# Altium PCB Beetech GSM MKR1400.PcbDoc
Units mm, origin at the board's own origin, x right, y up, seen from the top; angles counter-clockwise.
Board outline 90 x 88 mm, 2 copper layers (Top Layer, Bottom Layer), stack 1.671 mm thick; 33 components, 33 nets, 143 pads, 38 vias.
Unrouted connection lines stored in the file: 173.
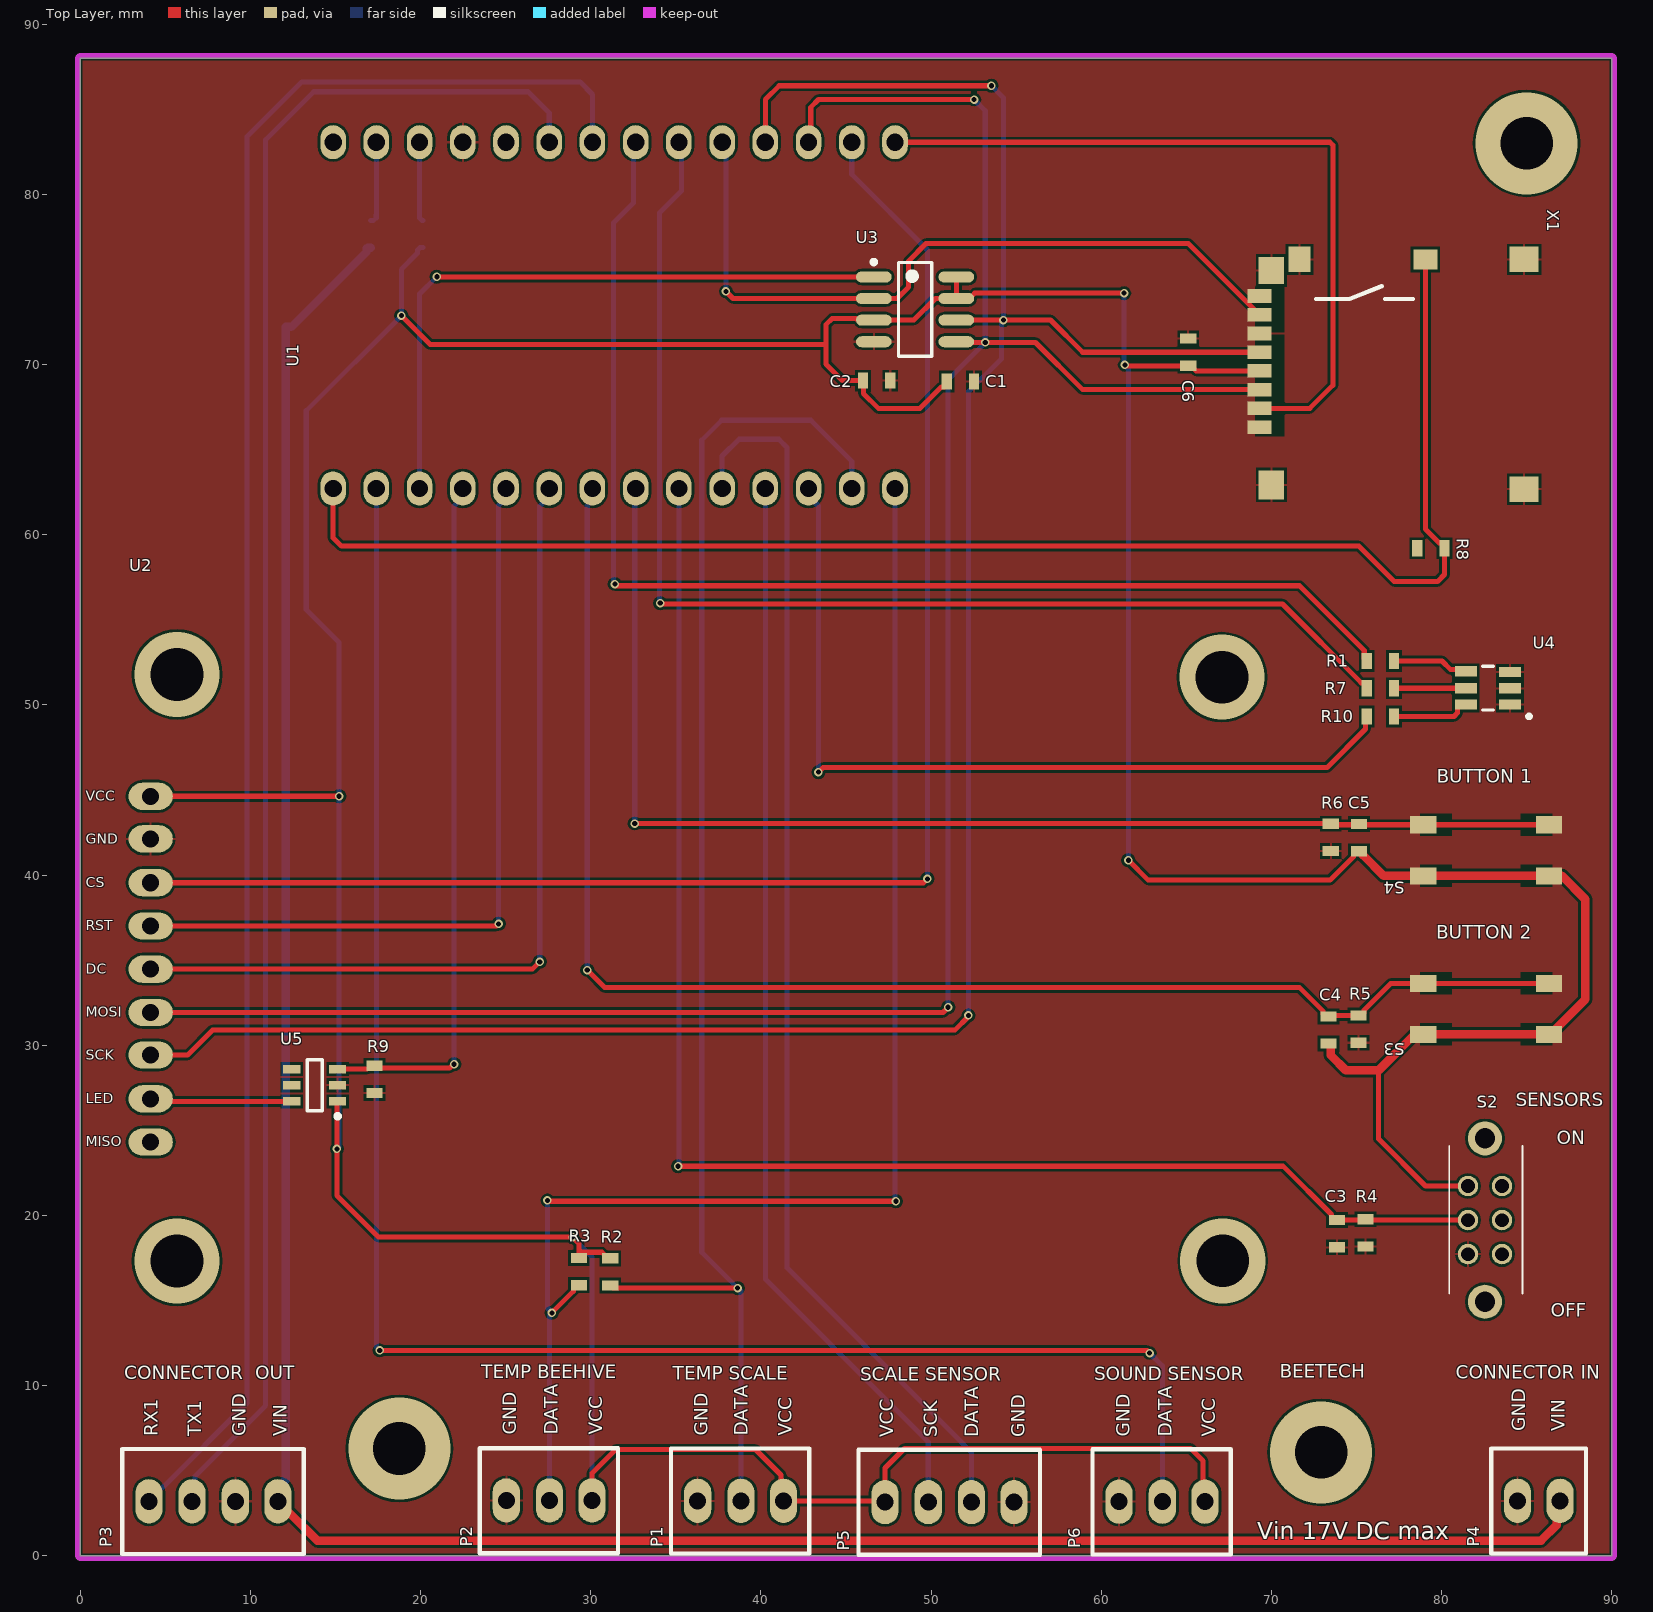
[diagram p0: Top Layer view]
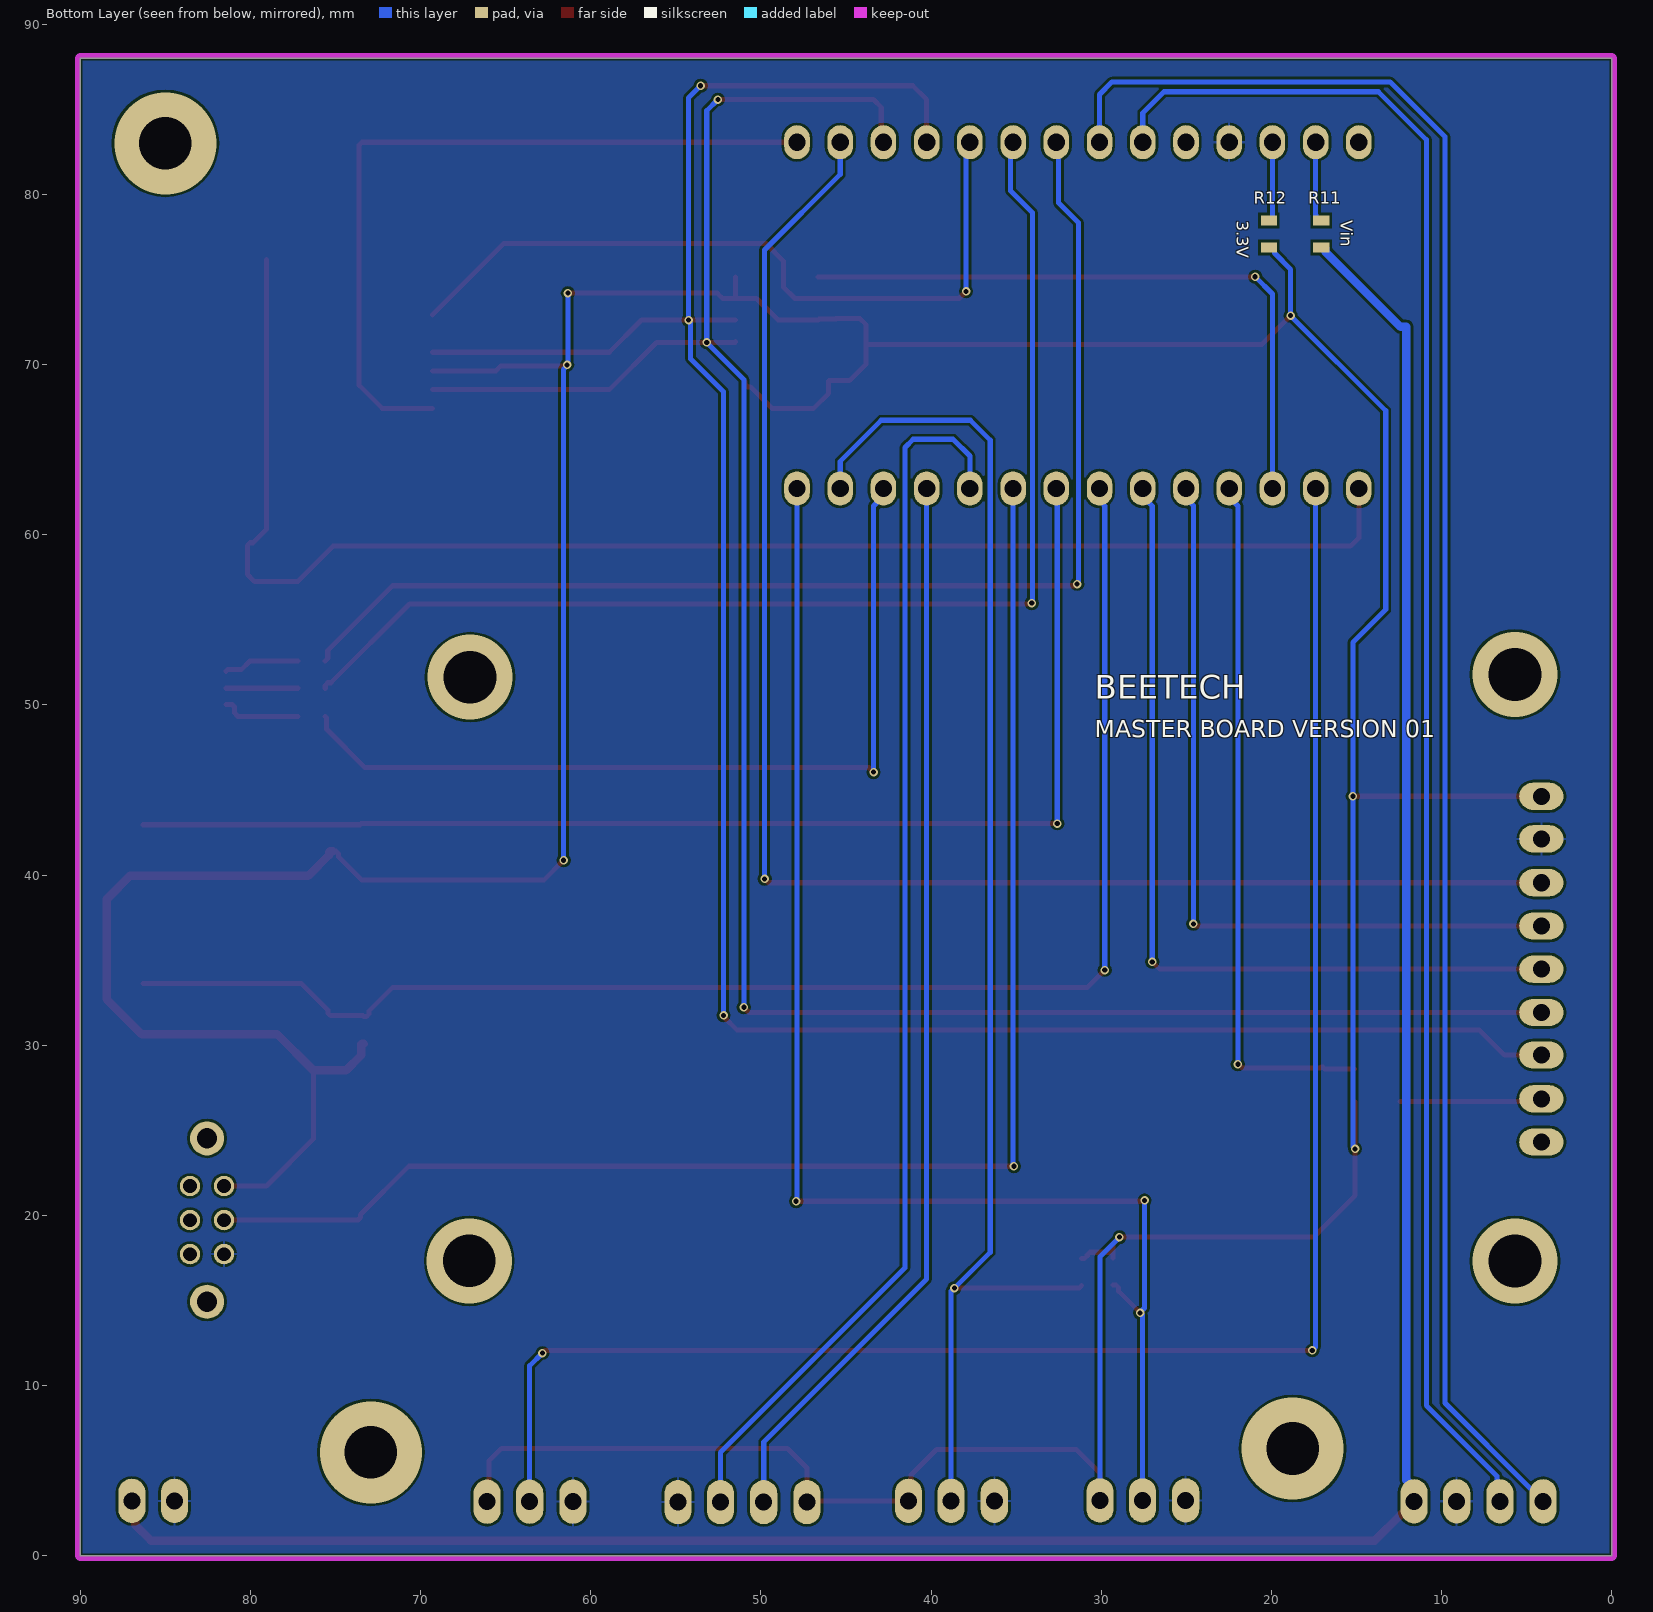
[diagram p1: Bottom Layer view, seen from below]

## Layer stack, top to bottom
Top Solder: solder mask 0.0102, Solder Resist, Dk 3.5
Top Layer: signal copper 0.0356
Dielectric1: core 1.6, FR-4, Dk 4.8
Bottom Layer: signal copper 0.0356
Bottom Solder: solder mask 0.0102, Solder Resist, Dk 3.5

## Board outline
0,0 90,0 90,88 0,88

## Design rules (kind name [scope] priority, off if disabled: settings)
Clearance Clearance_1 [InNamedPolygon('SW_L01_P024')] p1: gap=0.254 ignorepadtopadclearanceinfootprint=FALSE except(0: Arc-Hole Track-Hole SMDPad-Hole THPad-Hole Via-Hole Fill-Hole Poly-Hole Region-Hole Text-Hole)
Clearance [All] p2: gap=0.15 ignorepadtopadclearanceinfootprint=FALSE
ComponentClearance [All] p1: gap=0.001 collisioncheckmode=3 verticalgap=0.254 showdistances=FALSE
FabricationTestPointUsage [All] p1 off: valid=0 allowmultiple=FALSE
FabricationTestpoint [All] p1 off: side=3 testpointundercomponent=TRUE minsize=1.016 maxsize=2.54 preferedsize=1.524 minholesize=0 maxholesize=1.016 preferedholesize=0.813 testpointgrid=0.025 allowsidetop=TRUE allowsidebottom=TRUE usegrid=TRUE gridtolerance=0
HoleSize [All] p1: absolutevalues=TRUE maxlimit=6 minlimit=0.025 maxpercent=80.000 minpercent=20.000
HoleToHoleClearance [All] p1: gap=0 allowstackedmicrovias=TRUE
MinimumSolderMaskSliver [All] p1: minsoldermaskwidth=0
PolygonConnect PolygonConnect_14 [All vs IsNamedPolygon('GND_L01_P041')] p1: connectstyle=Relief reliefconductorwidth=0.15 reliefentries=4 polygonreliefangle="90 Angle" airgapwidth=0.15
PolygonConnect V_BAT_L01_P036 [All vs IsNamedPolygon('V_BAT_L01_P036')] p2: connectstyle=Direct reliefconductorwidth=0.254 reliefentries=4 polygonreliefangle="90 Angle" airgapwidth=0.254
PolygonConnect V_BAT2 [All vs IsNamedPolygon('V_BAT2_L01_P004')] p3: connectstyle=Direct reliefconductorwidth=0.254 reliefentries=4 polygonreliefangle="90 Angle" airgapwidth=0.254
PolygonConnect V_BAT [All vs IsNamedPolygon('V_BAT_L01_P010')] p4: connectstyle=Direct reliefconductorwidth=0.254 reliefentries=4 polygonreliefangle="90 Angle" airgapwidth=0.254
PolygonConnect V_SYS2 [All vs IsNamedPolygon('V_SYS2_L01_P012')] p5: connectstyle=Direct reliefconductorwidth=0.254 reliefentries=4 polygonreliefangle="90 Angle" airgapwidth=0.254
PolygonConnect +3.3b_uBlox [All vs IsNamedPolygon('+3.3V_UBLOX_L01_P014')] p6: connectstyle=Direct reliefconductorwidth=0.254 reliefentries=4 polygonreliefangle="90 Angle" airgapwidth=0.254
PolygonConnect V_LIPO_SYS_L01_P016 [All vs IsNamedPolygon('V_LIPO_SYS_L01_P016')] p7: connectstyle=Direct reliefconductorwidth=0.254 reliefentries=4 polygonreliefangle="90 Angle" airgapwidth=0.254
PolygonConnect V_LIPO_SYS_L01_P020 [All vs IsNamedPolygon('V_LIPO_SYS_L02_P020')] p8: connectstyle=Direct reliefconductorwidth=0.254 reliefentries=4 polygonreliefangle="90 Angle" airgapwidth=0.254
PolygonConnect V_SYS_L02_P024 [All vs IsNamedPolygon('V_SYS_L02_P024')] p9: connectstyle=Direct reliefconductorwidth=0.254 reliefentries=4 polygonreliefangle="90 Angle" airgapwidth=0.254
PolygonConnect VCC_USB_5.0V_L01_P026 [All vs IsNamedPolygon('VCC_USB_5.0V_L01_P026')] p10: connectstyle=Direct reliefconductorwidth=0.254 reliefentries=4 polygonreliefangle="90 Angle" airgapwidth=0.254
PolygonConnect SW [All vs IsNamedPolygon('SW_L01_P008')] p11: connectstyle=Direct reliefconductorwidth=0.254 reliefentries=4 polygonreliefangle="90 Angle" airgapwidth=0.254
PolygonConnect [All] p12: connectstyle=Relief reliefconductorwidth=0.15 reliefentries=4 polygonreliefangle="90 Angle" airgapwidth=0.15
RoutingVias [All] p1: holewidth=0.3 width=0.5 viastyle="Through Hole" minholewidth=0.2 minwidth=0.3 maxholewidth=1.2 maxwidth=2 useviatemplates=TRUE viatemplateguid#1={68F519FB-439D-452A-8ACF-2DE296BA9197} viatemplateguid#2={5ED9683F-E5DF-4E78-BDB1-49E541A8EC46} viatemplateguid#3={FAFF2F81-81C9-46E2-9D3D-D8AEF9417303} viatemplateguid#4={175E6F9D-763D-42D4-A59E-C21ACC7DA2E1} viatemplatename#1=v50h30m0mx0 viatemplatename#2=v50h30m50mx0 viatemplatename#3=v50h20 viatemplatename#4=v50h20mx0
SilkToSilkClearance [All] p1: silktosilkclearance=0.152
SilkToSolderMaskClearance [IsPad] p1: minsilkscreentomaskgap=0.127 clearancetoexposedcopper=TRUE
SolderMaskExpansion [All] p1: expansion=0.102 istentingtop=FALSE
Width [All] p1: maxlimit=5.08 minlimit=0.01 preferedwidth=0.305 minimp=50.000000 maximp=50.000000 favimp=50.000000
22 further rules are at their usual default settings.

## Components (designator, comment, footprint, x,y, rotation, side; value= is the part's Value field where it differs from the comment)
C1 "100nF 0603_1" "CAP 0603" 51.726,69.004 r180 top value=100nF
C2 "100nF 0603_1" "CAP 0603" 46.801,69.054 r180 top value=100nF
C3 "100nF 0603" "CAP 0603" 73.85,18.925 r270 top value=100nF
C4 "100nF 0603" "CAP 0603" 73.348,30.895 r90 top value=100nF
C5 "100nF 0603" "CAP 0603" 75.149,42.202 r90 top value=100nF
C6 "10uF 0603" "CAP 0603" 65.111,70.725 r270 top value=10uF
P1 "3-Pin Right Angle Housing" "3PIN - RND 205-EK254-2.54-03P" 41.325,3.225 r270 top
P2 "3-Pin Right Angle Housing" "3PIN - RND 205-EK254-2.54-03P" 30.078,3.25 r270 top
P3 "4-Pin Right Angle Housing" "4PIN - RND 205-EK254-2.54-04P" 11.615,3.2 r270 top
P4 "2-Pin Right Angle Housing" "2PIN - RND 205-EK254-2.54-02P" 86.965,3.225 r270 top
P5 "4-Pin Right Angle Housing" "4PIN - RND 205-EK254-2.54-04P" 54.875,3.15 r270 top
P6 "3-Pin Right Angle Housing" "3PIN - RND 205-EK254-2.54-03P" 66.09,3.175 r270 top
R1 "330 Ohm 0603" "RES 0603 FOOTPRINT" 76.403,52.578 r180 top value=330
R2 "4.7k Ohm 0603" "RES 0603 FOOTPRINT" 31.15,16.675 r270 top value=4.7k
R3 "4.7k Ohm 0603" "RES 0603 FOOTPRINT" 29.3,16.7 r270 top value=4.7k
R4 "1k Ohm 0603" "RES 0603 FOOTPRINT" 75.525,18.978 r90 top value=1k
R5 "10k Ohm 0603" "RES 0603 FOOTPRINT" 75.123,30.945 r90 top value=10k
R6 "10k Ohm 0603" "RES 0603 FOOTPRINT" 73.489,42.22 r90 top value=10k
R7 "330 Ohm 0603" "RES 0603 FOOTPRINT" 76.403,50.975 r180 top value=330
R8 "47k Ohm 0603" "RES 0603 FOOTPRINT" 79.375,59.2 r180 top value=47k
R9 "47k Ohm 0603" "RES 0603 FOOTPRINT" 17.297,27.991 r90 top value=47k
R10 "750 Ohm 0603" "RES 0603 FOOTPRINT" 76.403,49.324 r180 top value=750
R11 "0 Ohm 0603" "RES 0603 FOOTPRINT" 17.069,77.673 r270 bottom value=0
R12 "0 Ohm 0603" "RES 0603 FOOTPRINT" 20.151,77.673 r270 bottom value=0
S2 "Schiebeschalter EG2207" "Schiebeschalter on-on 2 P, EG2207" 82.55,19.725 r90 top
S3 "Taster Print_SMD_3" "Taster Print - SMD - PTS647SM70SMTR2LFS" 82.616,32.134 r180 top
S4 "Taster Print_SMD_3" "Taster Print - SMD - PTS647SM70SMTR2LFS" 82.616,41.456 r180 top
U1 "Arduino MKR GSM 1400" "Arduino GSM MKR 1400 v2" 11.05,72.875 r0 top locked
U2 "TFT 2.2 SPI 240x320" "TFT 2.2 SPI 240x320" 4.14,44.628 r0 top locked
U3 "FRAM MB85RS256BPNF-G-JNERE1" "SO 8Pin" 49.061,73.245 r0 top
U4 "LED Diode SMD LOW CURRENT" "LED SMD 3529 - 3.5 X 2.8MM" 82.725,50.975 r0 top
U5 "TPS22917DBVT" "SOT23 - 6" 13.78,27.65 r180 top
X1 "SD micro Card Holder_2" "SD Card Holder - micro - 2 - sd Card inserted" 85.7,75.425 r270 top

## Footprints (in the part's own frame and the unit in brackets; to place one, negate y for a bottom-side part, rotate by r counter-clockwise, add the part's x,y. Pads: shape width x height; smd on the part's side, far side on the other; paste and mask are expansions set on the pad)
"2PIN - RND 205-EK254-2.54-02P" [mm] "RND 205-EK254-2.54-02P"
  oval 2.6x1.6 hole 1: 1(0,0) 2(0,-2.5)
  silkscreen extent -3.07,-4.04 3.1,1.52, body extent -3.1,-3.99 3.1,1.55, height 8.51
"3PIN - RND 205-EK254-2.54-03P" [mm] "RND 205-EK254-2.54-03P"
  oval 2.6x1.6 hole 1: 1(0,0) 2(0,-2.5) 3(0,-5.04)
  silkscreen extent -3.07,-6.6 3.1,1.52, body extent -3.1,-6.55 3.1,1.53, height 8.51
"4PIN - RND 205-EK254-2.54-04P" [mm] "RND 205-EK254-2.54-04P"
  oval 2.6x1.6 hole 1: 1(0,0) 2(0,-2.5) 3(0,-5.04) 4(0,-7.58)
  silkscreen extent -3.07,-9.14 3.1,1.52, body extent -3.1,-9.1 3.1,1.52, height 8.51
"Arduino GSM MKR 1400 v2" [mm] "Arduino GSM MKR 1400 v2"
  oval 1.5x2 hole 1.016: 1(3.81,-10.16) 2(6.35,-10.16) 3(8.89,-10.16) 4(11.43,-10.16) 5(13.97,-10.16) 6(16.51,-10.16) 7(19.05,-10.16) 8(21.59,-10.16) 9(24.13,-10.16) 10(26.67,-10.16) 11(29.21,-10.16) 12(31.75,-10.16) 13(34.29,-10.16) 14(36.83,-10.16) 15(36.83,10.19) 16(34.29,10.19) 16(34.29,10.19) 17(31.75,10.19) 18(29.21,10.19) 19(26.67,10.19) 20(24.13,10.19) 21(21.59,10.19) 22(19.05,10.19) 23(16.51,10.19) 24(13.97,10.19) 25(11.43,10.19) 26(8.89,10.19) 27(6.35,10.19) 28(3.81,10.19)
  body extent -8.13,-12.5 62.32,12.5, height 18.11
"CAP 0603" [mm] "CAP 0603"
  rect 0.6x0.95 smd: 1(-0.8,0) 2(0.8,0)
  body extent -0.8,-0.4 0.8,0.4, height 0.8
"LED SMD 3529 - 3.5 X 2.8MM" [mm] "LED, 6-Leads, Body 3,50 x 2,80mm, IPC Medium Density"
  rect 1.3x0.6 smd: 1(1.3,-0.95) 2(1.3,0) 3(1.3,0.95) 4(-1.3,1) 5(-1.3,0) 6(-1.3,-0.95)
  silkscreen extent -0.3,-1.72 2.48,1.3, body extent -1.75,-1.4 1.75,1.4, height 1.9
"RES 0603 FOOTPRINT" [mm] "RES 0603 FOOTPRINT"
  rect 0.6x0.95 smd: 1(-0.8,0) 2(0.8,0)
  body extent -0.8,-0.4 0.8,0.4, height 0.8
"Schiebeschalter on-on 2 P, EG2207" [mm] "Schiebeschalter on-on 2 P, EG2207"
  round 1.2 hole 0.8: 1(-2,1) 2(0,1) 3(2,1) 4(-2,-1) 5(0,-1) 6(2,-1)
  round 2 hole 1.2: 10(-4.8,0) 10(4.8,0)
  silkscreen extent -4.33,-2.2 4.37,2.1, body extent -4.98,-3.05 5.02,2.95, height 7.7
"SD Card Holder - micro - 2 - sd Card inserted" [mm] "micro SD Card holder, Molex Part Number:   502774-0891"
  rect 0.8x1.4 smd: 1(9.1,-16.4) 2(8,-16.4) 3(6.9,-16.4) 4(5.8,-16.4) 5(4.7,-16.4) 6(3.6,-16.4) 7(2.5,-16.4) 8(1.4,-16.4)
  rect 1.2x1.4 smd: 10(-0.75,-6.65)
  rect 1.5x1.7 smd: 20(-0.75,-0.85) 20(12.75,-0.85)
  rect 1.5x1.3 smd: 20(-0.75,-14.05)
  rect 1.6x1.5 smd: 20(-0.1,-15.7)
  rect 1.7x1.5 smd: 20(12.5,-15.7)
  silkscreen extent 0.82,-13.08 1.57,-7.37, body extent -1,-16.1 13.3,2.2, height 1.81
"SO 8Pin" [mm] "SOIC, 8-Leads, Body 5,50x3,90mm, Pitch 1,27mm, IPC Medium Density"
  oval 2.1x0.65 smd: 1(-2.425,1.905) 2(-2.425,0.635) 3(-2.425,-0.635) 4(-2.425,-1.905) 5(2.425,-1.905) 6(2.425,-0.635) 7(2.425,0.635) 8(2.425,1.905)
  silkscreen extent -2.55,-2.75 0.98,2.9, body extent -1.95,-2.75 1.95,2.75, height 1.55
"SOT23 - 6" [mm] "SOT23, 6-Leads, Body 2,90x2,80mm, Pitch 0,95mm, IPC Medium Density"
  rect 1x0.5 smd: 1(-1.35,0.95) 2(-1.35,0) 3(-1.35,-0.95) 4(1.35,-0.95) 5(1.35,0) 6(1.35,0.95)
  silkscreen extent -1.48,-1.5 0.45,1.95, body extent -0.85,-1.5 0.85,1.5, height 1.1
"Taster Print - SMD - PTS647SM70SMTR2LFS" [mm] "https://www.mouser.ch/ProductDetail/CK/PTS647SM70SMTR2LFS?qs=PqoDHHvF64%252Bxl5nIb9IaOw%3D%3D"
  rect 1.55x1 smd: 1(3.7,1.5) 2(-3.7,1.5) 3(3.7,-1.5) 4(-3.7,-1.5)
  body extent -3.28,-2.22 3.22,2.28, height 7.2
"TFT 2.2 SPI 240x320" [mm]
  oval 2.6x1.6 hole 1: 1(0,0) 2(0,-2.5) 3(0,-5.08) 4(0,-7.62) 5(0,-10.16) 6(0,-12.7) 7(0,-15.2) 8(0,-17.78) 9(0,-20.32)
  body extent -1.52,-30.16 65.98,9.84, height 14.41

## Part data
C1 C2 C3 C4 C5 C6: "C CERAMIC SMD", Bezeichnung="C SMD", Haendler=Mouser, housing/footprint=0603
  C1 C2: Haendler Nr=603-CC0603JPX79BB104, Hersteller=Yageo, Hersteller Nr=CC0603JPX7R9BB104, Preis (CHF)=0.15, Umax=50V
  C3 C4 C5: Haendler Nr=710-885012206020, Hersteller=Würth, Hersteller Nr=885012206020, Preis (CHF)=0.05, Umax=10V
  C6: Dielektrikum=X5R, Haendler Nr=810-C1608X5R1A106K, Hersteller=TDK, Hersteller Nr=C1608X5R1A106K080AC, Preis (CHF)=0.5, Umax=10V
P1 P2 P6: library part "3-Pin Screw Terminal", "3-Pin", ComponentLink1Description=Mouser, ComponentLink1URL=https://www.mouser.ch/ProductDetail/TE-Connectivity/640453-2?qs=sGAEpiMZZMs%252bGHln7q6pm5E1Eb6qwPl2KIU5TYv3tVY%3d, Haendler=Distrelec, Haendler Nr=301-27-919, Preis (CHF)=0.60
P3 P5: library part "4-Pin Screw Terminal", "4-Pin", ComponentLink1Description=Mouser, ComponentLink1URL=https://www.mouser.ch/ProductDetail/TE-Connectivity/640453-2?qs=sGAEpiMZZMs%252bGHln7q6pm5E1Eb6qwPl2KIU5TYv3tVY%3d, Haendler=Distrelec, Haendler Nr=301-27-920, Hersteller=RND, Hersteller Nr="RND 205-EK254-2.54-04P", Preis (CHF)=0.60
P4: library part "2-Pin Screw Terminal", "2-Pin", ComponentLink1Description=Mouser, ComponentLink1URL=https://www.mouser.ch/ProductDetail/TE-Connectivity/640453-2?qs=sGAEpiMZZMs%252bGHln7q6pm5E1Eb6qwPl2KIU5TYv3tVY%3d, Haendler=Distrelec, Haendler Nr=301-27-918, Preis (CHF)=0.60
R1 R2 R3 R4 R5 R6 R7 R8 R9 R10 R11 R12: "R SMD", Bezeichnung="R SMD", Haendler=Mouser, housing/footprint=0603
  R1 R7: Haendler Nr=603-RC0603FR-07330RL, Preis (CHF)=0.01
  R2 R3: Haendler Nr=755-ESR03EZPF4701, Preis (CHF)=0.01
  R4: Haendler Nr=71-CRCW06031K00FKEAC, Hersteller Nr=CRCW06031K00FKEAC, Preis (CHF)=0.01
  R5 R6: Haendler Nr=603-AC0603FR-0710KL, Hersteller=Yageo, Hersteller Nr=AC0603FR-0710KL, Preis (CHF)=0.01
  R8 R9: Haendler Nr=603-AC0603FR-0747KL, Hersteller=Yageo, Hersteller Nr=AC0603FR-0747KL, Preis (CHF)=0.01
  R10: Haendler2=Farnell, Haendler2 Nr=2059597, Haendler Nr=71-CRCW0603750RFKEAH, Hersteller=Panasonic, Preis (CHF)=0.0123
  R11 R12: Haendler Nr=667-ERJ-3GEY0R00V, Hersteller=ERJ-3GEY0R00V, Hersteller Nr=Panasonic, Preis (CHF)=0.01
S2: "Schiebeschalter on-on PCM12SMTR", ComponentLink1Description=C&K, ComponentLink1URL=https://www.ckswitches.com/products/switches/product-details/Slide/AYZ/AYZ0202AGRLC/, Haendler=Mouser, Haendler Nr=612-EG2207, Hersteller="E SWITCH", Hersteller Nr=EG2207, Preis (CHF)=0.66
S3 S4: library part "Taster Print_SMD_6", "Taster", ComponentLink1Description=link, ComponentLink1URL=https://www.digikey.ch/product-detail/de/wurth-electronics-inc/430473035826/732-7021-1-ND/5225469, Haendler=Mouser, Haendler Nr=611-PTS647SM70SMTR2L, link=https://www.mouser.ch/ProductDetail/CK/PTS647SM70SMTR2LFS?qs=PqoDHHvF64%252Bxl5nIb9IaOw%3D%3D, Preis (CHF)=0.38
U1: "https://store.arduino.cc/arduino-mkr-gsm-1400-1415", ComponentLink3URL=http://ch.farnell.com/stmicroelectronics/stm32l496vgt6/mcu-arm-cortex-m4-80mhz-lqfp-100/dp/2725139?st=STM32L496VGT6, link=https://store.arduino.cc/arduino-mkr-gsm-1400-1415, Preis (CHF)=75
U2: "https://www.banggood.com/1_441_82_02_22_4-Inch-TFT-LCD-Display-Module-Colorful-Screen-Module-SPI-Interface-p-1494883.html?rmmds=search&ID=6211522&cur_warehouse=CN", ComponentLink3URL=http://ch.farnell.com/stmicroelectronics/stm32l496vgt6/mcu-arm-cortex-m4-80mhz-lqfp-100/dp/2725139?st=STM32L496VGT6, Haendler="Banggood / Aliexpress", link=https://www.banggood.com/1_441_82_02_22_4-Inch-TFT-LCD-Display-Module-Colorful-Screen-Module-SPI-Interface-p-1494883.html?rmmds=search&ID=6211522&cur_warehouse=CN, Link 2=https://de.aliexpress.com/item/4000839144387.html?spm=a2g0o.productlist.0.0.48ed5371jjv3wJ&algo_pvid=f087815a-197e-468a-8055-d99fc6734484&algo_expid=f087815a-197e-468a-8055-d99fc6734484-8&btsid=0ab50f6115912653966648062e4a8e&ws_ab_test=searchweb0_0,searchweb201602_,searchweb201603_, Preis (CHF)=6
U4: library part "LED Diode SMD - RGB - 3.5x2.8mm- 2mA", "AAAF3529LSEEZGKQBKS", COLOR=RGB, Forward Voltage=1.8V,2.6V,2.6V, Haendler=Mouser, Haendler Nr=604-AAAF3529LSEEZGKQ, Hersteller=Knightbright, Hersteller Nr=AAAF3529LSEEZGKQBKS, If=2mA, link=https://www.mouser.ch/ProductDetail/Kingbright/AAAF3529LSEEZGKQBKS/?qs=sGAEpiMZZMuCm2JlHBGefuS2vX%252blrKJR%252bqWFjFLEvKH8cDHFfJ9xOQ%3d%3d, Preis (CHF)=1.31
U5: "High Side Switch", Code_JEDEC="SOT 23-6", Haendler=Mouser, Haendler Nr=595-TPS22917DBVT, Hersteller=TI, Hersteller Nr=TPS22917DBVT, link=https://www.mouser.ch/ProductDetail/Texas-Instruments/TPS22917DBVT?qs=sGAEpiMZZMve4%2fbfQkoj%252bPJ2V24ZqG0%252bKgHGtqls2rU%3d, Preis (CHF)=0.6
X1: "SD micro Card  Holder", Haendler=Mouser, Haendler2=Farnell, Haendler2 Nr=2064063, Haendler Nr=538-502774-0891, Hersteller=Molex, Hersteller Nr=502774-0891, Preis (CHF)=3.15
U3: ComponentLink1Description="Product search", ComponentLink1URL=https://www.digikey.com/products/en?t=774&v=865&pv149=380462&pv961=349252&pv570=349254&pv142=158003, Haendler=digikey, Haendler Nr=865-1251-1-ND, Hersteller=FUJITSU, Hersteller Nr.=MB85RS256BPNF-G-JNERE1, Preis (CHF)=3.9

## Via types
v1: diameter 0.5, hole 0.3, Top Layer to Bottom Layer, tented both sides, 31 vias
v2: diameter 5, hole 3.1, Top Layer to Bottom Layer, tented both sides, 4 vias
v3: diameter 6, hole 3.1, Top Layer to Bottom Layer, 3 vias

## Nets (pads, with @x,y where several pads share a name; then routed paths per layer and width w, separated by ;. In a path a pad name is that pad's centre, name@x,y a point inside that pad or via, vN(x,y) a via of type N, cw(c..) or ccw(c..) an arc to the next point about the centre after c; other vN are vias at no path point)
BUTTON_1: C4.2 R5.2 S3.3 S3.4 U1.7 | length 87.1
  Top Layer w0.3: v1(29.794,34.417) 30.81,33.401 71.642,33.401 73.023,32.02 73.023,31.845 73.173,31.695 C4.2 73.398,31.745 R5.2 75.298,31.745 75.448,31.895 75.448,32.07 77.012,33.634 S3.3 S3.4
  Bottom Layer w0.3: v1(29.794,34.417) 29.794,61.689 29.87,61.765 29.87,62.485 U1.7
BUTTON_2: C5.2 R6.2 S4.3 S4.4 U1.8 | length 73.5
  Top Layer w0.3: v1(32.588,43.028) 32.596,43.02 R6.2 73.553,42.956 S4.3 S4.4
  Bottom Layer w0.3: v1(32.588,43.028) 32.588,62.663 U1.8
"CD SD": R8.1 U1.1 X1.10 | length 88.5
  Top Layer w0.3: U1.1 14.86,59.816 15.342,59.334 75.133,59.334 77.216,57.252 79.769,57.252 80.175,57.658 R8.1 80.175,59.375 80.025,59.525 79.85,59.525 79.05,60.325 X1.10
"CS FRAM": U1.3 U3.1 | length 38.5
  Top Layer w0.3: v1(20.955,75.159) 20.963,75.15 36.229,75.15 U3.1
  Bottom Layer w0.3: U1.3 19.94,74.144 v1(20.955,75.159)
"CS SD CARD": U1.15 X1.2 | length 44.8
  Top Layer w0.3: U1.15 73.433,83.065 73.609,82.889 73.609,68.783 72.251,67.425 X1.2
"CS TFT": U1.16 U2.3 | length 90.9
  Top Layer w0.3: U2.3 49.555,39.548 v1(49.784,39.776)
  Bottom Layer w0.3: U1.16@45.34,83.065 45.34,81.177 49.784,76.733 v1(49.784,39.776)
DATA_TEMP_1: P1.2 R2.2 U1.13 | length 82.5
  Top Layer w0.3: R2.2 31.3,15.725 31.648,15.725 31.651,15.723 v1(38.633,15.723)
  Bottom Layer w0.3: v1(38.633,15.723) 36.525,17.831 36.525,65.557 37.694,66.726 42.926,66.726 45.34,64.312 U1.13 ; P1.2 38.825,15.558
DATA_TEMP_2: P2.2 R3.2 U1.14 | length 82.6
  Top Layer w0.3: v1(27.457,20.879) 27.508,20.828 v1(47.93,20.828) ; v1(27.711,14.275) 28.975,15.538 28.975,15.75 29.125,15.9 R3.2
  Bottom Layer w0.3: v1(27.457,20.879) 27.457,14.551 27.711,14.297 v1(27.711,14.275) 27.578,14.141 P2.2 ; U1.14 47.88,20.878 v1(47.93,20.828)
"DC TFT": U1.6 U2.5 | length 51.1
  Top Layer w0.3: U2.5 26.568,34.468 v1(27,34.9)
  Bottom Layer w0.3: v1(27,34.9) 27,61.689 27.56,62.249 U1.6
DT_HX711: P5.2 U1.10 | length 72.8
  Bottom Layer w0.3: U1.10 37.72,64.619 38.71,65.608 41.046,65.608 41.529,65.126 41.529,16.919 52.375,6.073 P5.2
GND: C1.1 C2.1 C3.2 C6.1 P1.3 P2.3 P3.2 P4.2 P5.1 P6.3 R4.1 R5.1 R6.1 R9.1 S2.1 U1.25 U2.2 U3.4 U4.1 U4.2 U4.3 U5.2 X1.6 X1.20
"LED TFT": U2.8 U5.6 | length 8.4
  Top Layer w0.3: U2.8 4.288,26.7 U5.6
LED_B: R1.2 U1.21 | length 72.9
  Top Layer w0.3: v1(31.417,57.102) 31.519,57 71.65,57 75.453,53.197 75.453,52.728 R1.2
  Bottom Layer w0.3: v1(31.417,57.102) 31.344,57.175 31.344,78.334 32.512,79.502 32.512,82.937 U1.21
LED_G: R7.2 U1.20 | length 71.4
  Top Layer w0.3: v1(34.087,55.982) 34.138,55.931 70.647,55.931 75.278,51.3 75.453,51.3 75.603,51.15 R7.2
  Bottom Layer w0.3: v1(34.087,55.982) 34.049,56.02 34.049,56.161 34.036,56.174 34.036,78.918 35.331,80.213 35.331,82.914 U1.20
LED_R: R10.2 U1.12 | length 50.9
  Top Layer w0.3: v1(43.383,46.05) 43.658,46.325 73.275,46.325 75.533,48.583 75.533,49.254 R10.2
  Bottom Layer w0.3: U1.12 42.8,62.272 43.383,61.689 v1(43.383,46.05)
MISO: U1.19 U3.2 X1.7 | length 44.4
  Top Layer w0.3: v1(37.948,74.295) 38.362,73.88 U3.2 47.998,73.88 48.666,74.549 48.666,76.073 49.708,77.114 65.111,77.114 X1.7
  Bottom Layer w0.3: U1.19 37.948,82.837 v1(37.948,74.295)
MOSI: U1.17 U2.6 U3.5 X1.3 | length 132.4
  Top Layer w0.3: U2.6 50.698,31.928 v1(51.003,32.233) ; U1.17 42.926,83.191 42.926,85.115 43.386,85.575 v1(52.526,85.575) ; U3.5 51.529,71.298 v1(53.182,71.298) 56.134,71.298 58.907,68.525 X1.3
  Bottom Layer w0.3: v1(51.003,32.233) 51.003,69.119 v1(53.182,71.298) 53.182,84.919 v1(52.526,85.575)
NetR1_1: R1.1 U4.4 | length 4.5
  Top Layer w0.3: R1.1 80.025,52.578 80.533,52.07 81.33,52.07 U4.4
NetR7_1: R7.1 U4.5 | length 4.2
  Top Layer w0.3: R7.1 U4.5
NetR10_1: R10.1 U4.6 | length 4.7
  Top Layer w0.3: R10.1 80.724,49.324 80.932,49.532 80.932,49.875 81.082,50.025 U4.6
NetR12_1: R12.1 U1.26 | length 4.7
  Bottom Layer w0.3: U1.26 19.94,78.623 20.09,78.473 R12.1
"RST TFT": U1.5 U2.4 | length 46.3
  Top Layer w0.3: U2.4 24.46,37.008 v1(24.587,37.135)
  Bottom Layer w0.3: v1(24.587,37.135) 24.587,61.707 25.02,62.14 U1.5
"RX 1": P3.4 U1.22 | length 107.4
  Bottom Layer w0.3: P3.4 4.035,3.348 4.636,3.949 4.784,3.949 9.804,8.969 9.804,83.388 13.03,86.614 29.362,86.614 30.1,85.876 U1.22
SCK: U1.18 U2.7 U3.6 X1.5 | length 139.6
  Top Layer w0.3: U2.7 6.314,29.428 7.772,30.886 51.388,30.886 52.197,31.695 v1(52.197,31.75) ; U1.18 40.26,85.575 41.07,86.385 v1(53.543,86.385) ; U3.6 v1(54.254,72.61) 57.021,72.61 58.907,70.725 X1.5
  Bottom Layer w0.3: v1(52.197,31.75) 52.197,68.402 54.127,70.333 54.127,72.43 54.254,72.556 v1(54.254,72.61) 54.254,85.675 v1(53.543,86.385)
SCK_HX711: P5.3 U1.11 | length 63.5
  Bottom Layer w0.3: U1.11 40.26,16.255 49.835,6.68 P5.3
SOUND_DATA: P6.2 U1.2 | length 105.1
  Top Layer w0.3: v1(17.602,12.065) 62.687,12.065 v1(62.84,11.913)
  Bottom Layer w0.3: U1.2 17.4,12.267 v1(17.602,12.065) ; v1(62.84,11.913) 63.59,11.162 P6.2
SWITCH: C3.1 R4.2 S2.2 U1.9 | length 87.7
  Top Layer w0.3: v1(35.128,22.885) 70.69,22.885 73.525,20.05 73.525,19.875 73.675,19.725 C3.1 S2.2
  Bottom Layer w0.3: v1(35.128,22.885) 35.18,22.937 U1.9
"TFT LED ENABLE": R9.2 U1.4 U5.3 | length 41.1
  Top Layer w0.3: U5.3 16.857,28.6 16.981,28.724 17.051,28.724 17.124,28.651 21.695,28.651 21.924,28.88 v1(21.971,28.88)
  Bottom Layer w0.3: v1(21.971,28.88) 21.971,61.689 22.48,62.198 U1.4
"TX 1": P3.3 U1.23 | length 101.9
  Bottom Layer w0.3: P3.3 6.753,3.378 6.753,4.69 10.897,8.833 10.897,83.21 13.716,86.03 26.315,86.03 27.56,84.785 U1.23
"V IN": P3.1 P4.1 R11.2 | length 154.3
  Top Layer w0.5: P3.1 11.615,2.998 12.123,2.49 12.326,2.49 13.926,0.889 85.852,0.889 86.755,1.792 86.755,3.015 P4.1
  Bottom Layer w0.5: P3.1 11.615,3.998 12.065,4.447 12.065,72.212 12.408,72.212 16.844,76.648 16.844,76.823 16.894,76.873 R11.2
"V IN uC": R11.1 U1.27 | length 4.8
  Bottom Layer w0.3: R11.1 17.244,78.473 17.394,78.623 17.394,78.798 17.4,78.804 U1.27
"VCC 3.3V": C1.2 C2.2 C4.1 C5.1 C6.2 P1.1 P2.1 P5.4 P6.1 R2.1 R3.1 R12.2 S2.3 S3.1 S3.2 S4.1 S4.2 U2.1 U3.3 U3.7 U3.8 U5.1 X1.4 | length 314.9
  Top Layer w0.3: U2.1 v1(15.215,44.628) ; U5.1 15.088,26.658 v1(15.088,23.908) 15.088,21.158 17.527,18.719 v1(28.932,18.719) 29.3,18.351 29.3,18.007 ; v1(18.872,72.873) 20.562,71.183 43.815,71.183 ; R3.1 29.3,18.007 ; P2.1 30.078,4.851 31.475,6.248 39.675,6.248 41.178,4.745 41.178,3.372 P1.1 47.22,3.225 P5.4 47.295,5.156 48.438,6.299 65.253,6.299 65.989,5.563 65.989,3.276 P6.1 ; R2.1 30.975,17.475 30.825,17.625 30.825,17.655 30.649,17.831 29.476,17.831 29.3,18.007 ; C1.2 50.926,68.829 50.776,68.679 50.601,68.679 49.347,67.425 46.9,67.425 46.02,68.305 46.02,69.035 C2.2 44.787,69.054 43.815,70.027 43.815,71.183 ; U3.8 U3.7 ; v1(61.341,74.193) 52.562,74.193 52.249,73.88 U3.7 ; v1(61.392,69.977) 61.444,69.925 C6.2 65.286,69.925 65.586,69.625 X1.4 ; v1(61.595,40.869) 62.763,39.7 73.448,39.7 74.824,41.077 74.824,41.252 74.974,41.402 C5.1 ; 76.304,28.524 76.304,24.483 79.062,21.725 S2.3 ; 43.815,71.183 43.815,72.339 44.171,72.695 45.58,72.695 45.597,72.677 46.569,72.677 U3.3 48.988,72.61 50.258,73.88 U3.7
  Top Layer w0.5: C4.1 73.442,30.095 73.492,30.045 73.492,29.403 74.371,28.524 76.304,28.524 78.414,30.634 S3.1 S3.2 86.387,30.634 88.443,32.69 88.443,38.583 87.069,39.956 S4.2 S4.1 76.595,39.956 75.374,41.177 75.374,41.352 75.324,41.402 C5.1
  Bottom Layer w0.3: v1(15.088,23.908) 15.215,24.035 v1(15.215,44.628) 15.215,53.67 13.284,55.601 13.284,67.285 v1(18.872,72.873) 18.872,75.595 19.826,76.548 19.826,76.723 19.976,76.873 R12.2 ; v1(28.932,18.719) 30.078,17.573 P2.1 ; v1@61.341,70.169 v1(61.341,74.193) ; v1(61.392,69.977) 61.392,69.923 61.595,69.72 v1(61.595,40.869)
"VCC 5V": R8.2
pads on no net: S2.4 S2.5 S2.6 S2.10 U1.24 U1.28 U2.9 U5.4 U5.5 X1.1 X1.8
copper on no net:
  other v2: 5.69,17.318 67.14,17.328 67.09,51.628 5.69,51.788
  other v3: 72.925,6.073 18.75,6.298 85,83

## Polygon pours and split planes (outlines as drawn)
GND on Top Layer "GND_L01_P002" (solid, pour order 2): 0,0 90,0 90,88 0,88
GND on Bottom Layer "GND_L02_P003" (solid, pour order 3): 0,0 90,0 90,88 0,88

## Keep-outs
Keep-Out Layer:
  lines w0.3: -0.15,0 ccw(c0,0) 0,-0.15 ; -0.15,0 ccw(c0,0) 0,-0.15 ; -0.15,0 -0.15,88 ; -0.15,88 cw(c0,88) 0,88.15 ; -0.15,88 cw(c0,88) 0,88.15 ; 0,-0.15 90,-0.15 ; 0,88.15 90,88.15 ; 90,-0.15 ccw(c90,0) 90.15,0 ; 90,-0.15 ccw(c90,0) 90.15,0 ; 90,88.15 cw(c90,88) 90.15,88 ; 90,88.15 cw(c90,88) 90.15,88 ; 90.15,0 90.15,88

## Silkscreen, mask and mechanical layers (free items; w line width, h text height)
Top Overlay:
  text "BUTTON 1" at 79.725,45.425 h0.8
  text "BUTTON 2" at 79.675,36.25 h0.8
  text "SENSORS" at 84.352,26.425 h0.8
  text "ON" at 86.766,24.193 h0.8
  text "OFF" at 86.416,14.045 h0.8
  text "BEETECH" at 70.497,10.45 h0.8
  text "TEMP BEEHIVE" at 23.574,10.425 h0.8
  text "CONNECTOR IN" at 80.847,10.4 h0.8
  text "CONNECTOR  OUT" at 2.571,10.375 h0.8
  text "TEMP SCALE" at 34.821,10.35 h0.8
  text "SCALE SENSOR" at 45.831,10.275 h0.8
  text "SOUND SENSOR" at 59.586,10.3 h0.8
  text "GND" at 84.914,7.314 h0.8 r90
  text "VIN" at 87.225,7.314 h0.8 r90
  text "GND" at 25.625,7.122 h0.8 r90
  text "DATA" at 28.05,7.122 h0.8 r90
  text "VCC" at 30.675,7.122 h0.8 r90
  text "GND" at 36.875,7.047 h0.8 r90
  text "DATA" at 39.23,7.047 h0.8 r90
  text "VCC" at 41.825,7.047 h0.8 r90
  text "RX1" at 4.565,7.022 h0.8 r90
  text "TX1" at 7.115,7.022 h0.8 r90
  text "GND" at 9.74,7.022 h0.8 r90
  text "VIN" at 12.14,7.022 h0.8 r90
  text "GND" at 61.675,6.997 h0.8 r90
  text "DATA" at 64.15,6.997 h0.8 r90
  text "VCC" at 66.7,6.997 h0.8 r90
  text "VCC" at 47.775,6.972 h0.8 r90
  text "SCK" at 50.35,6.972 h0.8 r90
  text "DATA" at 52.775,6.972 h0.8 r90
  text "GND" at 55.5,6.972 h0.8 r90
  text "Vin 17V DC max" at 69.163,0.975 h1
Bottom Overlay:
  text "Vin" at 15.927,78.488 h0.7 r90
  text "3.3V" at 22.023,78.453 h0.7 r90
  text "BEETECH" at 30.387,50.35 h1.4
  text "MASTER BOARD VERSION 01" at 30.382,48.104 h1

## Text inside footprints (layer, text, board x,y; h text height)
U2: Top Overlay "MISO" at 0.33,24.054 h0.6; Top Overlay "MOSI" at 0.33,31.674 h0.6; Top Overlay "SCK" at 0.33,29.134 h0.6; Top Overlay "LED" at 0.33,26.594 h0.6; Top Overlay "CS" at 0.33,39.294 h0.6; Top Overlay "GND" at 0.33,41.834 h0.6; Top Overlay "VCC" at 0.33,44.374 h0.6; Top Overlay "RST" at 0.33,36.754 h0.6; Top Overlay "DC" at 0.33,34.214 h0.6